# Altium PCB Motorsteuerung.PcbDoc
Units mm, origin at the board's own origin, x right, y up, seen from the top; angles counter-clockwise.
Board outline 63.63 x 66.55 mm, 4 copper layers (Top Layer, GND, 3V3, Bottom Layer), stack 0.603 mm thick; 42 components, 21 nets, 162 pads, 178 vias.
Unrouted connection lines stored in the file: 47.
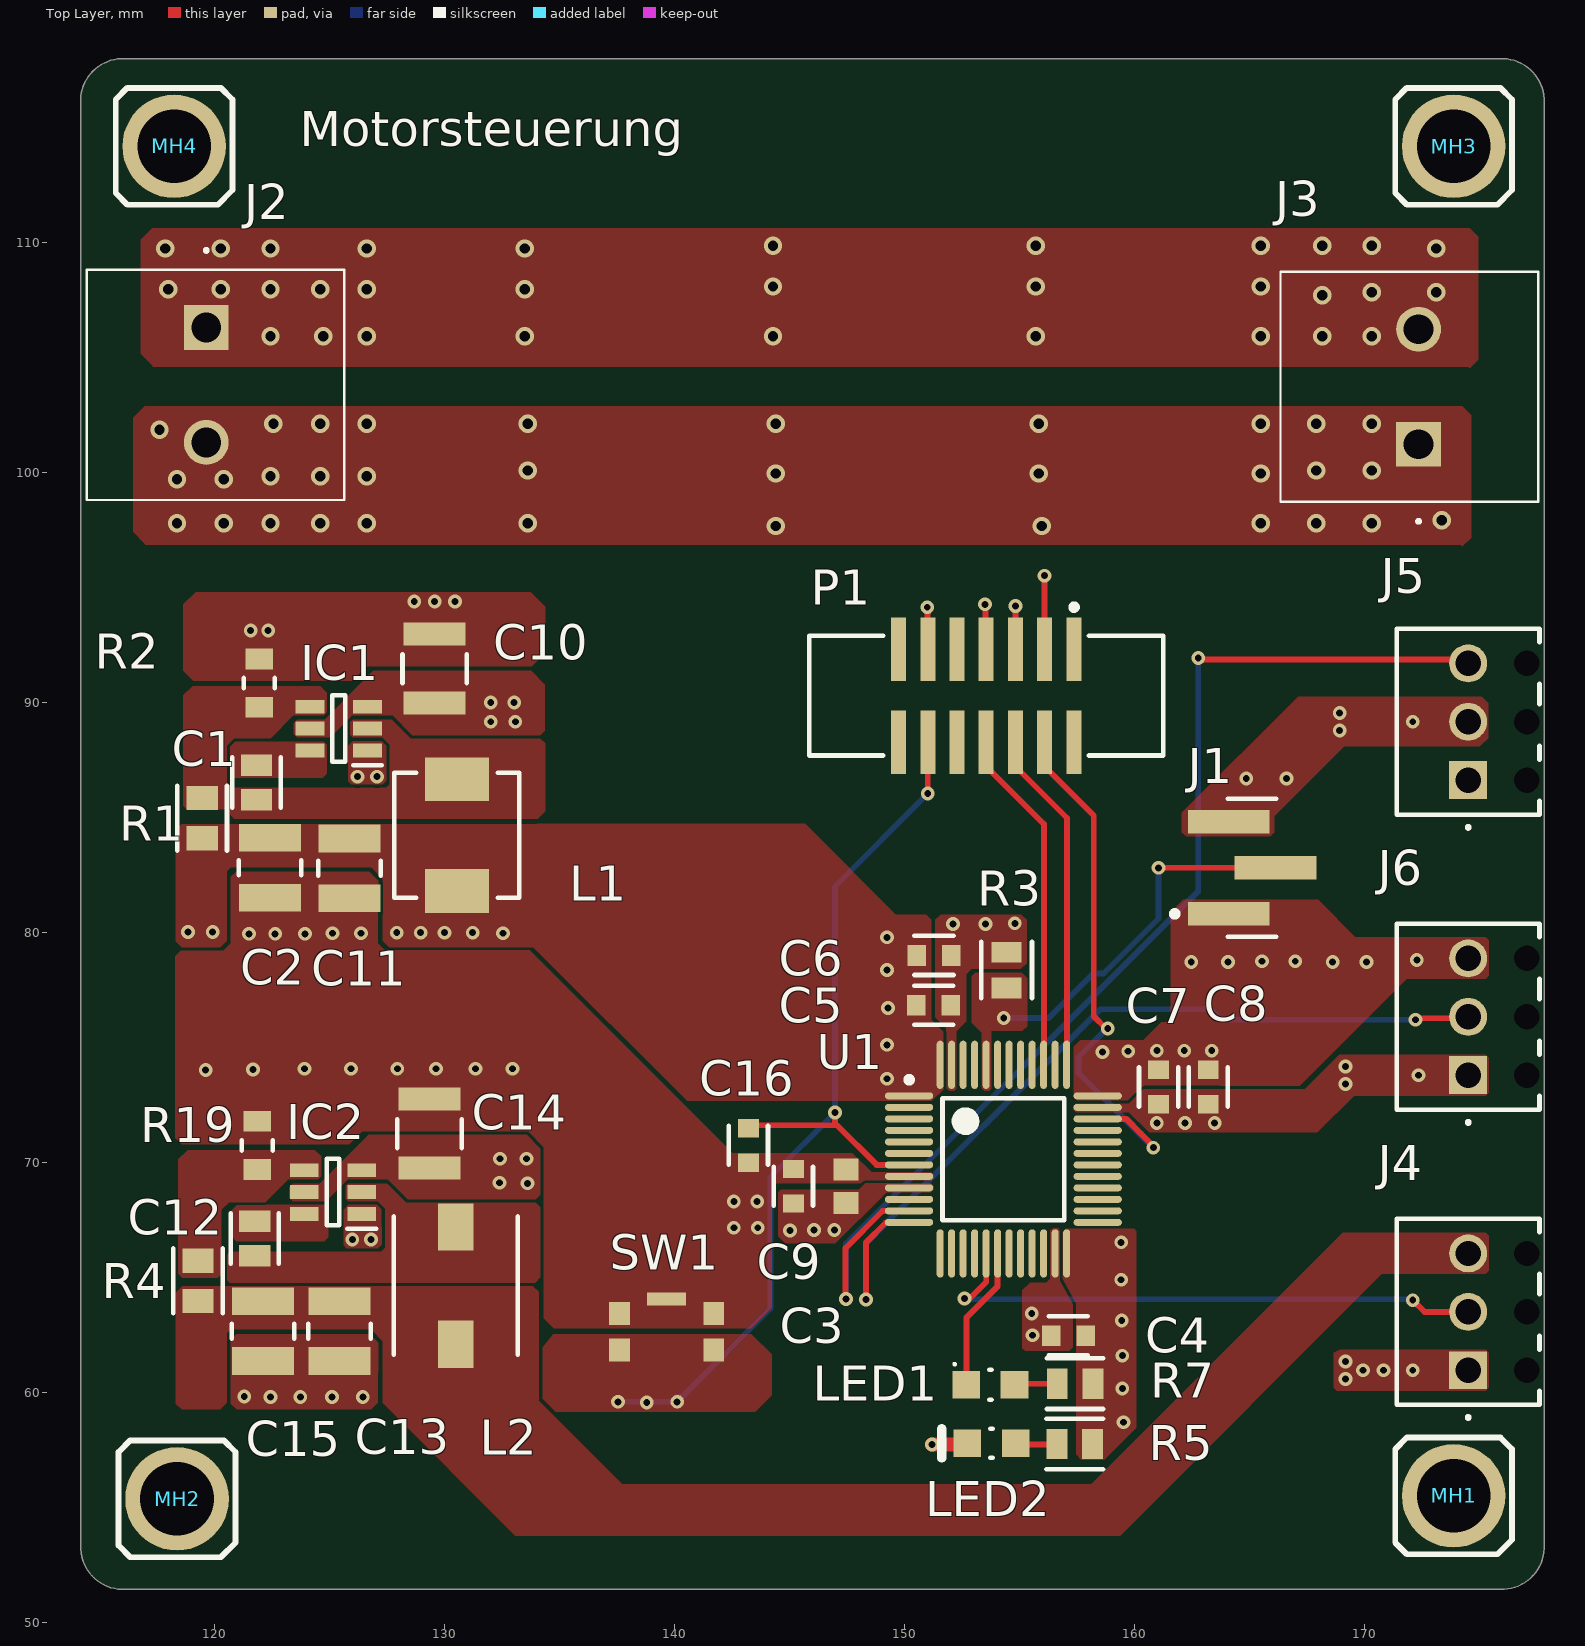
[diagram p0: Top Layer view]
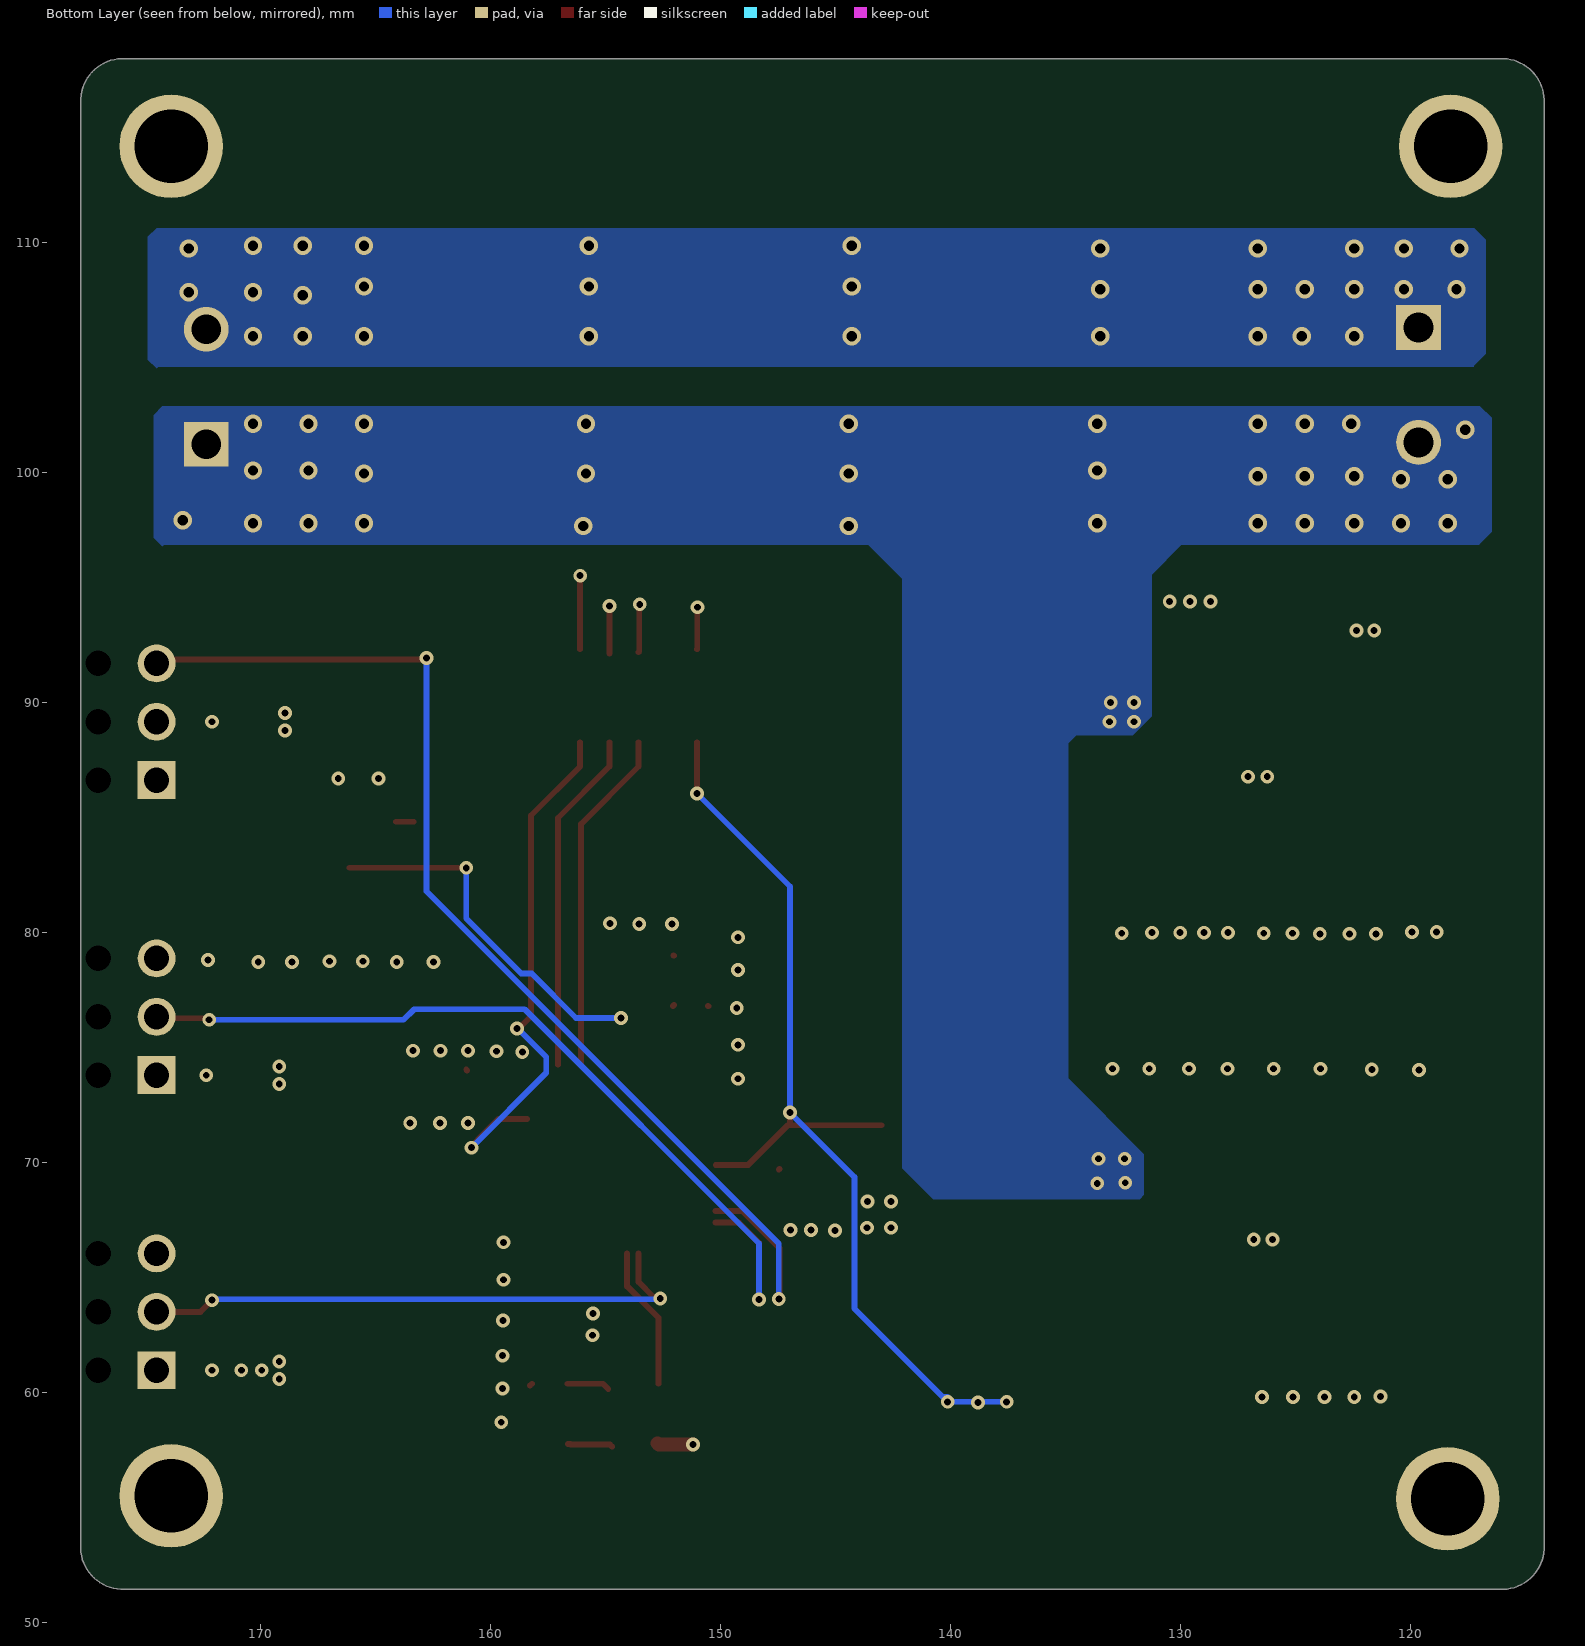
[diagram p1: Bottom Layer view, seen from below]
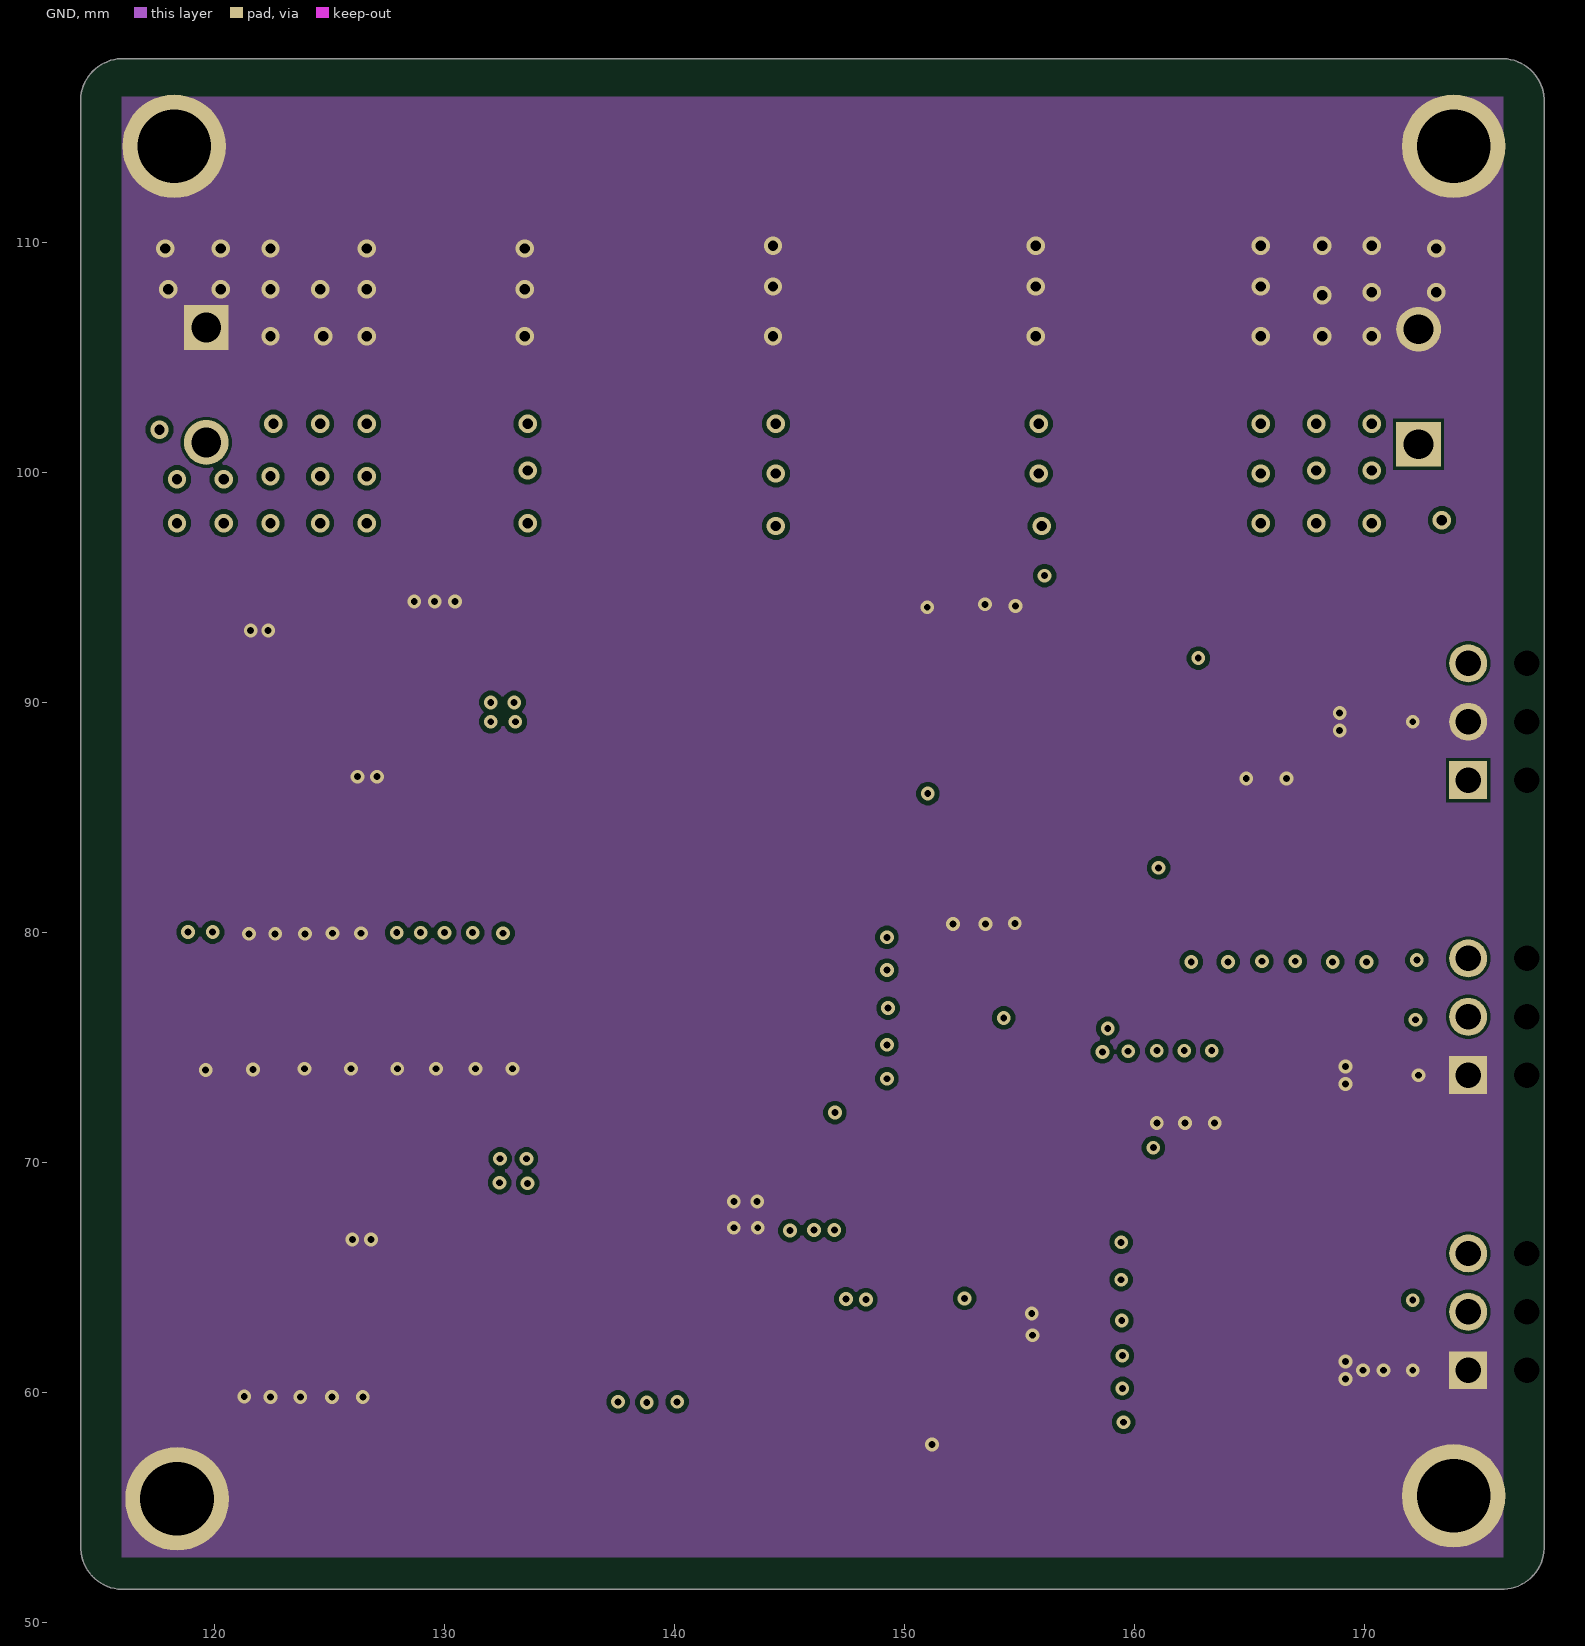
[diagram p2: GND]
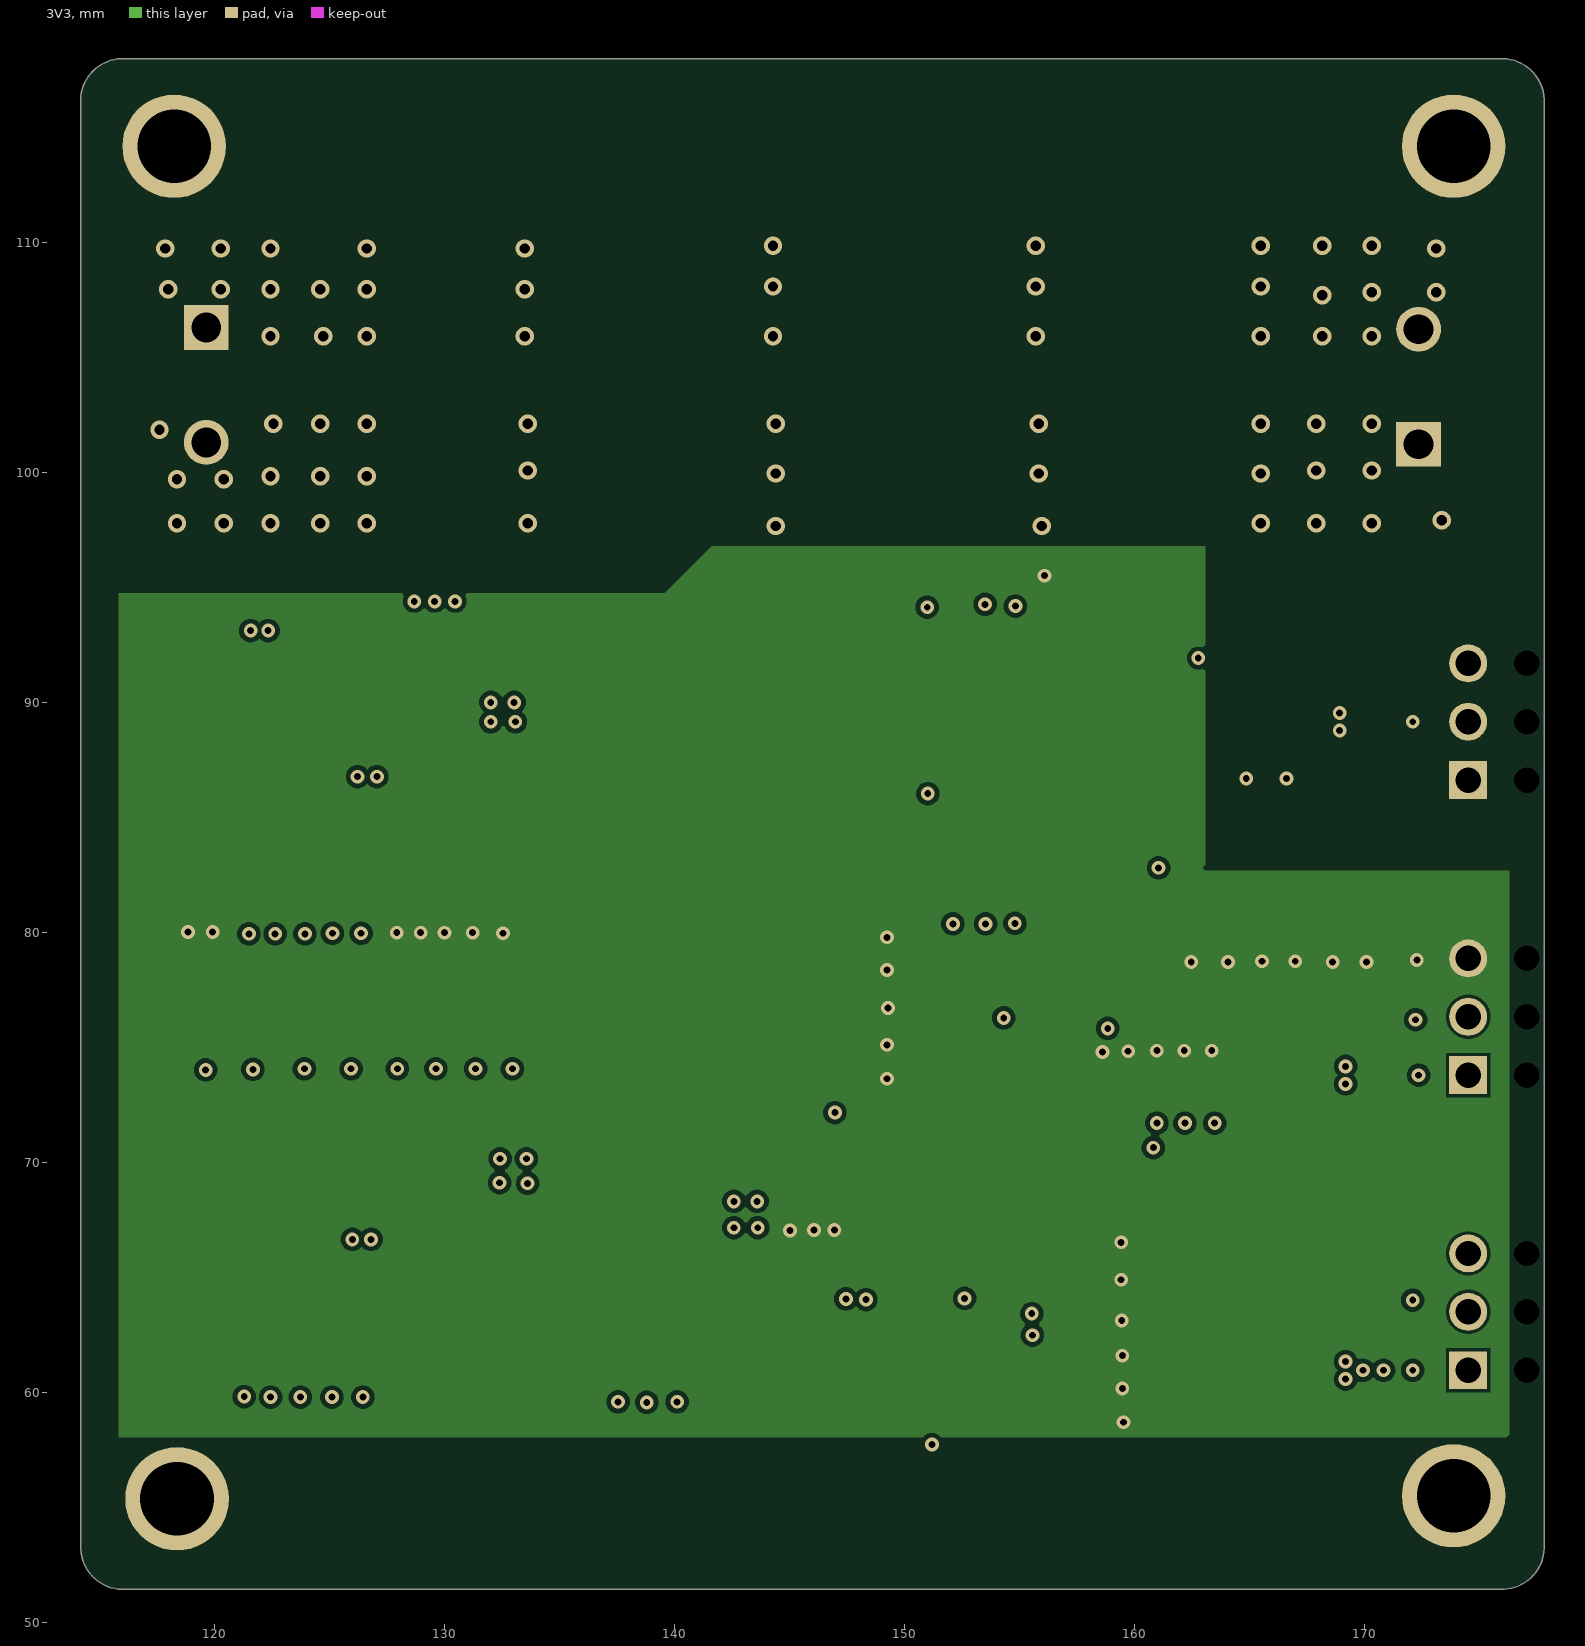
[diagram p3: 3V3]
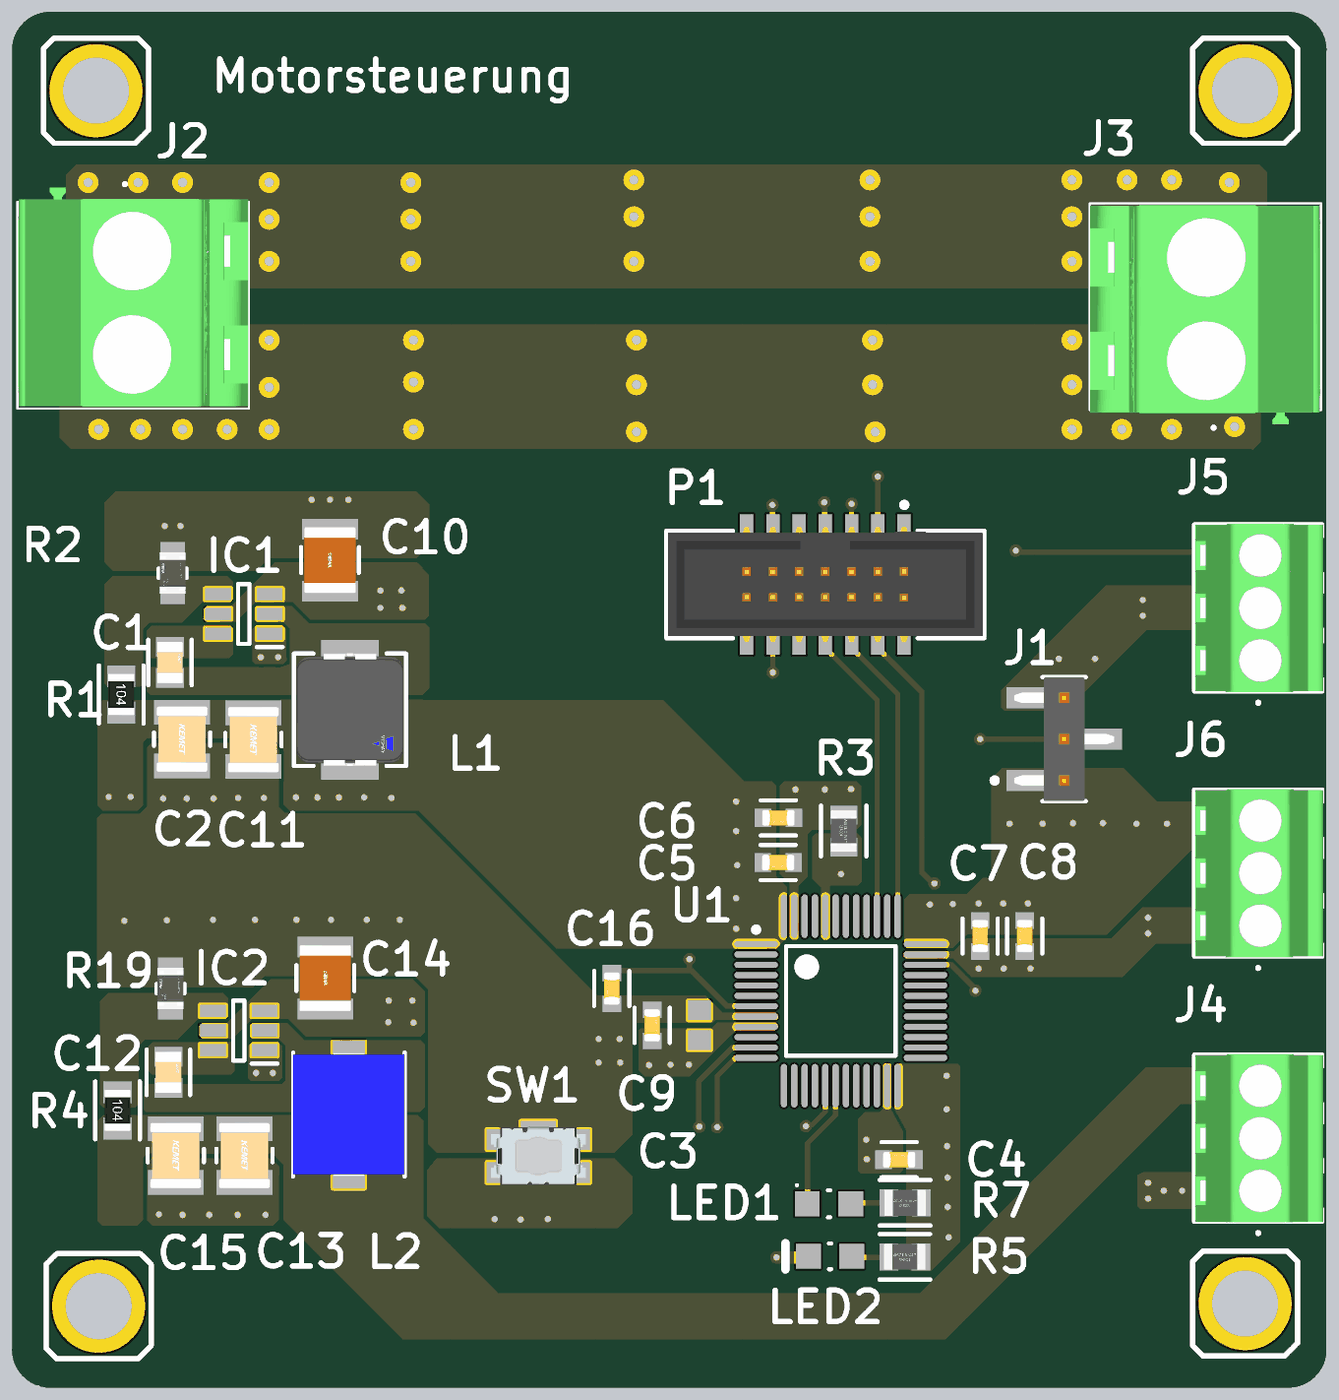
[diagram p4: 3D render of the assembled board from above, using the file's embedded part models]

## Layer stack, top to bottom
Top Solder: solder mask 0.0102, Solder Resist, Dk 3.5
Top Layer: signal copper 0.0356
Dielectric 2: prepreg 0.0711, PP-006, Dk 4.1
GND: signal copper 0.035
Dielectric 1: dielectric 0.32, FR-4, Dk 4.8
3V3: signal copper 0.035
Dielectric 3: prepreg 0.0711, PP-006, Dk 4.1
Bottom Layer: signal copper 0.0356
Bottom Solder: solder mask 0.0102, Solder Resist, Dk 3.5

## Board outline
114.173,53.34 ccw(c116.014,53.276) 115.951,51.435 175.895,51.435 ccw(c175.958,53.276) 177.8,53.213 177.8,116.078 ccw(c175.958,116.141) 176.022,117.983 116.078,117.983 ccw(c116.014,116.141) 114.173,116.205

## Design rules (kind name [scope] priority, off if disabled: settings)
Clearance [All] p1: gap=0.125 ignorepadtopadclearanceinfootprint=FALSE except(0.2: Via-Fill Via-Poly Via-Region)
HoleSize HoleSizeVia [IsVia] p1: absolutevalues=TRUE maxlimit=0.45 minlimit=0.25 maxpercent=80.000 minpercent=20.000
HoleSize HoleSizePTH [IsPad] p2: absolutevalues=TRUE maxlimit=5.6 minlimit=0.5 maxpercent=80.000 minpercent=20.000
HoleToHoleClearance [All] p1: gap=0.3 allowstackedmicrovias=TRUE
MinimumAnnularRing MinimumAnnularRingVias [All] p1: minimumring=0.1
MinimumAnnularRing MinimumAnnularRingGeneral [All] p2: minimumring=0.3
MinimumSolderMaskSliver [All] p1: minsoldermaskwidth=0.08
PasteMaskExpansion PasteMaskExpansion_2 [All] p1: expansion=0
PasteMaskExpansion PasteMaskExpansion_1 [All] p2: expansion=0
PasteMaskExpansion [InComponent('U1')] p3: expansion=0
PolygonConnect [All] p1: connectstyle=Direct reliefconductorwidth=0.254 reliefentries=4 polygonreliefangle="90 Angle" airgapwidth=0.254
RoutingVias [All] p1: holewidth=0.35 width=0.55 viastyle="Through Hole" minholewidth=0.3 minwidth=0.5 maxholewidth=0.45 maxwidth=0.65
SilkToSilkClearance SilkToSilkClerance [All] p1: silktosilkclearance=0.125
SilkToSolderMaskClearance [IsPad] p1: minsilkscreentomaskgap=0.125 clearancetoexposedcopper=TRUE
SolderMaskExpansion SolderMaskExpansion_1 [All] p1: expansion=0.102 istentingtop=FALSE
SolderMaskExpansion SolderMaskExpansionVia [IsVia] p2: expansion=0.1 istentingtop=TRUE useseparateexpansions=TRUE expansionbottom=0.1 istentingbottom=TRUE
SolderMaskExpansion [InComponent('U1')] p3: expansion=0 istentingtop=FALSE
SupplyNets "Schematic Supply Nets_5" [InNet('3V3')] p1: voltage=0.000
SupplyNets "Schematic Supply Nets_4" [InNet('12V')] p2: voltage=0.000
SupplyNets "Schematic Supply Nets_3" [InNet('5V')] p3: voltage=0.000
SupplyNets "Schematic Supply Nets_1" [InNet('GND')] p4: voltage=0.000
UnRoutedNet [All] p1: checkbadconnections=TRUE
Width [All] p1: maxlimit=2.54 minlimit=0.125 preferedwidth=0.254
23 further rules are at their usual default settings.

## Components (designator, comment, footprint, x,y, rotation, side; value= is the part's Value field where it differs from the comment)
C1 "100nf" FP-C0805C104M5UACTU-MFG 121.818,86.512 r270 top
C2 "22uF" FP-C1210C226K4RACTU-MFG 122.403,82.804 r270 top
C3 "10nF" CAPC1608X92X38ML15T08 147.447,68.961 r270 top
C4 "100nF" FP-CC0603-DA-MFG 157.112,62.459 r180 top value="100 nF"
C5 "100nF" FP-CC0603-DA-MFG 151.257,76.835 r0 top value="100 nF"
C6 "4,7uF" FP-CC0603-DA-MFG 151.269,78.994 r0 top value="4.7 uF"
C7 "100nF" FP-CC0603-DA-MFG 161.036,73.279 r270 top value="100 nF"
C8 "4,7uF" FP-CC0603-DA-MFG 163.195,73.279 r270 top value="4.7 uF"
C9 "1uF" FP-CC0603-DA-MFG 145.161,68.961 r90 top value="1 uF"
C10 "2.2uF" FP-CC1210-G3-MFG 129.565,91.465 r90 top
C11 "22uF" FP-C1210C226K4RACTU-MFG 125.857,82.779 r270 top
C12 "100nf" FP-C0805C104M5UACTU-MFG 121.742,66.688 r270 top
C13 "22uF" FP-C1210C226K4RACTU-MFG 125.425,62.662 r270 top
C14 "2.2uF" FP-CC1210-G3-MFG 129.337,71.247 r90 top
C15 "22uF" FP-C1210C226K4RACTU-MFG 122.098,62.662 r270 top
C16 "100nF" FP-CC0603-DA-MFG 143.205,70.739 r270 top value="100 nF"
IC1 "LMR51430XFDDCR" SOT95P280X110-6N 125.394,88.859 r180 top
IC2 "LMR51430XFDDCR" SOT95P280X110-6N 125.146,68.707 r180 top
J1 "TMM-103-01-L-S-SM" FP-TMM-103-01-L-S-SM-MFG 165.101,82.804 r90 top
J2 "1711026" 1711026 119.634,106.299 r270 top
J3 "1711026" 1711026 172.339,101.219 r90 top
J4 "1725669" 1725669 174.498,60.96 r90 top
J5 "1725669" 1725669 174.498,86.614 r90 top
J6 "1725669" 1725669 174.498,73.787 r90 top
L1 "2.2uH" FP-IHLP-2020BZ-FP_1_905X2-MFG 130.531,84.226 r270 top
L2 "3.3uH" INDPM6054X300N 130.48,64.643 r270 top
LED1 "LTST-C170KRKT" LTST-C170KRKT_V 153.772,57.785 r180 top
LED2 "LTST-C170KGKT" LTST-LTST-C170KGKT-2_V 153.721,60.325 r0 top
MH1 "MountingHole" MTH 173.863,55.499 r0 top
MH2 "MountingHole" MTH 118.364,55.372 r0 top
MH3 "MountingHole" MTH 173.863,114.173 r0 top
MH4 "MountingHole" MTH 118.237,114.173 r0 top
P1 "62701420621" 62701420621 153.543,90.285 r180 top
R1 "100k" FP-RQ73C2A-IPC_B 119.456,84.963 r270 top
R2 "22k1" FP-RT0805-MFG 121.945,90.83 r90 top value=22.1KΩ
R3 "10k" FP-CRGCQ0805-IPC_C 154.432,78.359 r90 top value=10KΩ
R4 "100k" FP-RQ73C2A-IPC_B 119.278,64.846 r270 top
R5 "1k" FP-CRGCQ0805-IPC_C 157.392,57.76 r180 top value=1KΩ
R7 "1k" FP-CRGCQ0805-IPC_C 157.404,60.376 r180 top value=1KΩ
R19 "13k7" FP-RT0805-MFG 121.844,70.739 r90 top value=13.7KΩ
SW1 "435441019830" 435441019830 139.649,62.636 r0 top
U1 "STM32F091CCT6" LQFP48_M 154.29,70.14 r0 top

## Footprints (in the part's own frame and the unit in brackets; to place one, negate y for a bottom-side part, rotate by r counter-clockwise, add the part's x,y. Pads: shape width x height; smd on the part's side, far side on the other; paste and mask are expansions set on the pad)
1711026 [mm]
  rect 1.95x1.95 hole 1.3: 1(0,0)
  round 1.95 hole 1.3: 2(5,0)
  silkscreen extent -3.4,-5.2 7.5,6, body extent -3.18,-5.17 7.42,5.98, height 18
1725669 [mm]
  rect 1.65x1.65 hole 1.1: 1(0,0)
  round 1.65 hole 1.1: 2(2.54,0) 3(5.08,0)
  round 0.55 hole 1.1 unplated: MH1(0,-2.54) MH2(2.54,-2.54) MH3(5.08,-2.54)
  silkscreen extent -2.1,-3.1 6.58,3.1, body extent -1.54,-3.15 6.6,3.05, height 8.5
62701420621 [mm] "Boc Header SMT type, 14p"
  rect 0.65x2.76 smd: 1(-3.81,-2.02) 2(-3.81,2.02) 3(-2.54,-2.02) 4(-2.54,2.02) 5(-1.27,-2.02) 6(-1.27,2.02) 7(0,-2.02) 8(0,2.02) 9(1.27,-2.02) 10(1.27,2.02) 11(2.54,-2.02) 12(2.54,2.02) 13(3.81,-2.02) 14(3.81,2.02)
  silkscreen extent -7.7,-3.97 7.7,2.6, body extent -7.62,-2.8 7.62,2.8, height 5.2
435441019830 [mm] "Tact Switch, SMT, body 4.1x2.8mm"
  rect 0.9x1 smd: A1(-2.05,0.8) A2(2.05,0.8) B1(-2.05,-0.8) B2(2.05,-0.8)
  rect 1.7x0.55 smd: G1(0,1.425)
  body extent -2.3,-1.4 2.3,1.45, height 1.9
CAPC1608X92X38ML15T08 [mm] "Chip Capacitor, 2-Leads, Body 1.60x0.80mm, IPC Low Density"
  rect 0.95x1.1 smd: 1(-0.725,0) 2(0.725,0)
  body extent -0.87,-0.48 0.87,0.47, height 0.92
FP-C0805C104M5UACTU-MFG [mm]
  rect 0.95x1.35 smd paste+0 mask+0: 1(-0.75,0) 2(0.75,0)
  silkscreen extent -1.1,-1.05 1.1,1.05, body extent -1.4,-0.85 1.4,0.85, height 0.25
FP-C1210C226K4RACTU-MFG [mm]
  rect 1.2x2.7 smd paste+0 mask+0: 1(-1.3,0) 2(1.3,0)
  silkscreen extent -0.33,-1.36 0.33,1.36, body extent -2,-1.5 2,1.5, height 0.25
FP-CC0603-DA-MFG [mm]
  rect 0.8x0.9 smd paste+0 mask+0: 1(-0.75,0) 2(0.75,0)
  silkscreen extent -0.85,-0.85 0.85,0.85, body extent -1.35,-0.75 1.35,0.75, height 0.25
FP-CC1210-G3-MFG [mm]
  rect 1x2.7 smd paste+0 mask+0: 1(-1.5,0) 2(1.5,0)
  silkscreen extent -0.63,-1.4 0.63,1.4, body extent -2.32,-1.83 2.32,1.83, height 0.25
FP-CRGCQ0805-IPC_C [mm]
  rect 0.906x1.31 smd paste+0 mask+0: 1(-0.776,0) 2(0.776,0)
  silkscreen extent -1.23,-1.1 1.23,1.1, body extent -1.33,-0.8 1.33,0.8, height 0.25
FP-IHLP-2020BZ-FP_1_905X2-MFG [mm]
  rect 1.905x2.79 smd paste+0 mask+0: 1(-2.425,0) 2(2.425,0)
  silkscreen extent -2.72,-2.72 2.72,2.72, body extent -3.48,-2.82 3.48,2.82, height 0.25
FP-RQ73C2A-IPC_B [mm]
  rect 1.058x1.362 smd paste+0 mask+0: 1(-0.877,0) 2(0.877,0)
  silkscreen extent -1.41,-1.08 1.41,1.08, body extent -1.66,-0.93 1.66,0.93, height 0.25
FP-RT0805-MFG [mm]
  rect 0.9x1.2 smd paste+0 mask+0: 1(-1.05,0) 2(1.05,0)
  silkscreen extent -0.23,-0.67 0.23,0.67, body extent -1.6,-0.77 1.6,0.77, height 0.25
FP-TMM-103-01-L-S-SM-MFG [mm]
  rect 1.02x3.56 smd paste+0 mask+0: 1(-2,1.015) 2(0,-1.015) 3(2,1.015)
  silkscreen extent -3,-1.05 3,3.49, body extent -3.1,-2.89 3.1,2.89, height 0.25
INDPM6054X300N [mm]
  rect 2.05x1.55 smd: 1(-2.55,0) 2(2.55,0)
  silkscreen extent -3,-2.7 3,2.7, body extent -3,-2.7 3,2.7, height 3
LQFP48_M [mm] "Thin QFP, 48-Leads, Body 7x7mm, Pitch 0.5mm, IPC Low Density"
  oval 2.1x0.3 smd: 1(-4.1,2.75) 2(-4.1,2.25) 3(-4.1,1.75) 4(-4.1,1.25) 5(-4.1,0.75) 6(-4.1,0.25) 7(-4.1,-0.25) 8(-4.1,-0.75) 9(-4.1,-1.25) 10(-4.1,-1.75) 11(-4.1,-2.25) 12(-4.1,-2.75) 25(4.1,-2.75) 26(4.1,-2.25) 27(4.1,-1.75) 28(4.1,-1.25) 29(4.1,-0.75) 30(4.1,-0.25) 31(4.1,0.25) 32(4.1,0.75) 33(4.1,1.25) 34(4.1,1.75) 35(4.1,2.25) 36(4.1,2.75)
  oval 0.3x2.1 smd: 13(-2.75,-4.1) 14(-2.25,-4.1) 15(-1.75,-4.1) 16(-1.25,-4.1) 17(-0.75,-4.1) 18(-0.25,-4.1) 19(0.25,-4.1) 20(0.75,-4.1) 21(1.25,-4.1) 22(1.75,-4.1) 23(2.25,-4.1) 24(2.75,-4.1) 37(2.75,4.1) 38(2.25,4.1) 39(1.75,4.1) 40(1.25,4.1) 41(0.75,4.1) 42(0.25,4.1) 43(-0.25,4.1) 44(-0.75,4.1) 45(-1.25,4.1) 46(-1.75,4.1) 47(-2.25,4.1) 48(-2.75,4.1)
  silkscreen extent -4.22,-2.65 2.65,3.57, body extent -3.5,-3.5 3.5,3.5, height 1.6
LTST-C170KRKT_V [mm] "SMD, 2-Leads, Body 2x1.25mm"
  rect 1.2x1.2 smd: 1(-1.05,0) 2(1.05,0)
  silkscreen extent -0.05,-0.63 2.16,0.64, body extent -1,-0.63 1,0.63, height 1.2
LTST-LTST-C170KGKT-2_V [mm] "SMD, 2-Leads, Body 2.00x1.25mm"
  rect 1.2x1.2 smd: 1(-1.05,0) 2(1.05,0)
  silkscreen extent -1.6,-0.65 0.05,0.95, body extent -1,-0.63 1,0.63, height 1.1
MTH [mm]
  round 4.5 hole 3.2: 1(0,0)
  silkscreen extent -2.54,-2.54 2.54,2.54
SOT95P280X110-6N [mm]
  rect 1.25x0.6 smd: 1(-1.25,0.95) 2(-1.25,0) 3(-1.25,-0.95) 4(1.25,-0.95) 5(1.25,0) 6(1.25,0.95)
  silkscreen extent -1.88,-1.45 0.28,1.6, body extent 0,0 0,0

## Part data
C1 C12: library part CMP-2007-03742-2, "CAP CER 0.1UF 50V Z5U 0805", Capacitance=100nF, Case Code (Imperial)=0805, Case Code (Metric)=2012, Dielectric=Z5U, Dielectric Material=Ceramic, Max Operating Temperature=85°C, Min Operating Temperature=10°C, Package Quantity=1, Tolerance=20%, Voltage=50V, Case/Package=0805, Construction=Flat, Contact Plating=Tin, Depth=1.25mm, Dissipation Factor=4%, Height=0.78mm, Lead Free="Lead Free", Lead Pitch=0.75mm, Length=2mm, Mount="Surface Mount", Number of Pins=2, Packaging="Tape and Reel", Radiation Hardening=No, REACH SVHC="No SVHC", RoHS Compliant=Yes, Series=C, Termination=SMD/SMT, Thickness=0.035inch, Voltage Rating=50V, Voltage Rating (DC)=50V, Width=1.2mm
C2 C11 C13 C15: library part CMP-03020-034651-1, "CAP CER 22UF 16V X7R 1210", Case Code (Imperial)=1210, Case Code (Metric)=3225, Dielectric=X7R, Dielectric Material=Ceramic, Max Operating Temperature=125°C, Min Operating Temperature=-55°C, Package Quantity=1000, Tolerance=10%, Voltage=16V, Capacitance=22uF, Case/Package=1210, Depth=2.5mm, Dissipation Factor=5%, Height=2.5mm, Length=3.2mm, Mount="Surface Mount", Packaging="Cut Tape", REACH SVHC="No SVHC", Termination=SMD/SMT, Thickness=0.11inch, Voltage Rating=16V, Voltage Rating (DC)=16V, Weight=0.000564oz, Width=0.098inch
C3: library part CMP-2006-01137-1, Manufacturer=Vitramon, Part Number=VJ0603Y103KXJAC
C4 C5 C7 C16: library part CMP-03422-000234-1, "CAP CER 0.1UF 25V X7R 0603", Capacitance="100 nF", Manufacturer=YAGEO, Manufacturer Part Number=CC0603KRX7R8BB104, Package=CC0603-DA, Temperature="-55°C to +125°C", Temperature Characteristic=X7R, Temperature Coefficient=15%, Temperature Range High=+125°C, Temperature Range Low=-55°C, Tolerance=0.1, Voltage="25 V", Automotive=No, Category=Cap, ComponentLink2Description=Datasheet, ComponentLink2URL=http://www.yageo.com/documents/recent/UPY-GPHC_X7R_6.3V-to-50V_18.pdf, Device Class L1="Passive Components", Device Class L2=Capacitors, Device Class L3="Ceramic Capacitors", Digikey Description="CAP CER 0.1UF 25V X7R 0603", Footprint Url=http://www.yageo.com/exep/pages/download/literatures/UPY-C_GEN_24.pdf, Height=0.9mm, Lead Free=Yes, Material=Ceramic, Mouser Description="CC Series 0603 0.1 uF 25 V ±10% Tolerance X7R SMT Multilayer Ceramic Capacitor", Octopart=https://octopart.com/cc0603krx7r8bb104-yageo-8376534, RoHS=TRUE, Voltage Rating="25 V"
C6 C8: library part CMP-03422-001236-1, "CAP CER 4.7UF 16V X5R 0603", Capacitance="4.7 uF", Manufacturer=YAGEO, Manufacturer Part Number=CC0603KRX5R7BB475, Package=CC0603-DA, Temperature="-55°C to +125°C", Temperature Characteristic=X5R, Temperature Coefficient=15%, Temperature Range High=+125°C, Temperature Range Low=-55°C, Tolerance=0.1, Voltage="16 V", Automotive=No, Category=Cap, ComponentLink2Description=Datasheet, ComponentLink2URL=http://www.yageo.com/documents/recent/UPY-GPHC_X7R_6.3V-to-50V_18.pdf, Device Class L1="Passive Components", Device Class L2=Capacitors, Device Class L3="Ceramic Capacitors", Digikey Description="CAP CER 4.7UF 16V X5R 0603", Footprint Url=http://www.yageo.com/exep/pages/download/literatures/UPY-C_GEN_24.pdf, Height=0.9mm, Lead Free=Yes, Material=Ceramic, Mouser Description="Multilayer Ceramic Capacitors MLCC - SMD/SMT 4.7uF 16V X5R 10%", Octopart=https://octopart.com/cc0603krx5r7bb475-yageo-34978295, RoHS=TRUE, Voltage Rating="16 V"
C9: library part CMP-1035-02737-2, "CAP CER 1UF 16V X5R 0603", Capacitance="1 uF", Manufacturer=YAGEO, Manufacturer Part Number=CC0603KRX5R7BB105, Package=CC0603-DA, Temperature="-55°C to +125°C", Temperature Characteristic=X5R, Temperature Coefficient=15%, Temperature Range High=+125°C, Temperature Range Low=-55°C, Tolerance=0.1, Voltage="16 V", Automotive=No, Category=Cap, ComponentLink2Description=Datasheet, ComponentLink2URL=http://www.yageo.com/documents/recent/UPY-GPHC_X7R_6.3V-to-50V_18.pdf, Device Class L1="Passive Components", Device Class L2=Capacitors, Device Class L3="Ceramic Capacitors", Digikey Description="CAP CER 1UF 16V X5R 0603", Footprint Url=http://www.yageo.com/exep/pages/download/literatures/UPY-C_GEN_24.pdf, Height=0.9mm, Lead Free=Yes, Material=Ceramic, Mouser Description="Multilayer Ceramic Capacitors MLCC - SMD/SMT 1.0uF 16V X5R 10%", Octopart=https://octopart.com/cc0603krx5r7bb105-yageo-8376530, RoHS=TRUE, Voltage Rating="16 V"
C10 C14: library part CMP-03422-001503-1, "CAP CER 1210", Case/Package=1210, Dielectric=X7R, Max Operating Temperature=125°C, Min Operating Temperature=-55°C, Tolerance=10%, Capacitance=2.2uF, Depth=2.5mm, Length=3.2mm, Packaging="Tape and Reel", RoHS Compliant=Yes
IC1 IC2: "Integrated Circuit", Manufacturer_Name="Texas Instruments", Mouser Part Number=595-LMR51430XFDDCR, Arrow Part Number=LMR51430XFDDCR, Arrow Price/Stock=https://www.arrow.com/en/products/lmr51430xfddcr/texas-instruments.html?utm_currency=USD&region=nac, Datasheet Link=https://www.ti.com/lit/ds/symlink/lmr51420.pdf?ts=1651317966125, Height=1.1mm, Manufacturer_Part_Number=LMR51430XFDDCR, Mouser Price/Stock=https://www.mouser.co.uk/ProductDetail/Texas-Instruments/LMR51430XFDDCR?qs=vvQtp7zwQdOoH7ISqkGKmw%3D%3D
J1: library part CMP-02766-001735-1, "CONN HEADER SMD 3POS 2MM", Flammability Rating="UL94 V-0", Housing Color=Black, Max Current Rating=3.9A, Max Operating Temperature=125°C, Max Voltage Rating (AC)=500V, Min Operating Temperature=-55°C, Connector Type=Header, Contact Finish - Mating=GOLD, Contact Material=Bronze, Contact Plating=Gold, Contact Shape=Square, Contact Type="Male Pin", Depth=1.97mm, Fastening Type=Pull, Gender=Male, Housing Material=Polymer, Insulation Color=Black, Insulation Material=Polymer, Lead Free="Lead Free", Length=6mm, Number of Contacts=3, Number of Positions=3, Number of Rows=1, Orientation=Straight, Packaging=Bulk, Pitch=2mm, Radiation Hardening=No, REACH SVHC="No SVHC", RoHS Compliant=Yes, Series=TMM, Termination=Solder
J2 J3: "Connector", Manufacturer_Name="Phoenix Contact", Mouser Part Number=651-1711026, Arrow Part Number=1711026, Arrow Price/Stock=https://www.arrow.com/en/products/1711026/phoenix-contact?utm_currency=USD&region=nac, Datasheet Link=https://www.phoenixcontact.com/en-us/products/printed-circuit-board-terminal-mkds-3-2-1711026?type=pdf, Height=18.2mm, Manufacturer_Part_Number=1711026, Mouser Price/Stock=https://www.mouser.co.uk/ProductDetail/Phoenix-Contact/1711026?qs=JcjeNNoqGSMahJ%2FDM5awSg%3D%3D
J4 J5 J6: "Connector", Manufacturer_Name="Phoenix Contact", Mouser Part Number=651-1725669, Arrow Part Number=1725669, Arrow Price/Stock=https://www.arrow.com/en/products/1725669/phoenix-contact?utm_currency=USD&region=nac, Datasheet Link=https://www.phoenixcontact.com/en-us/products/printed-circuit-board-terminal-mpt-05-3-254-1725669?type=pdf, Height=8.65mm, Manufacturer_Part_Number=1725669, Mouser Price/Stock=https://www.mouser.co.uk/ProductDetail/Phoenix-Contact/1725669?qs=A%2FKWGUWTCZjmkTL0Oe91ew%3D%3D
L1: library part CMP-02424-000260-1, "Fixed Inductors Commercial Low DCR Series 2.2uH 5A 37.7mΩ 20%", Case/Package=2020, Current Rating=5A, DC Resistance (DCR)=37.7mR, Inductance Tolerance=20%, Max DC Current=5.5A, Max Operating Temperature=125°C, Min Operating Temperature=-55°C, Package Quantity=2000, Self Resonant Frequency=41MHz, Test Frequency=100kHz, Contact Plating=Tin, Core Material=Metal, Depth=5.43mm, Height=2mm, Height - Seated (Max)=0.079inch, Inductance=2.2uH, Lead Free="Lead Free", Length=5.74mm, Military Standard=Not, Mount="Surface Mount", Number of Pins=2, Packaging="Tape and Reel", Radiation Hardening=No, RMS Current (Irms)=5A, Saturation Current=5.5A, Shielding=Shielded, Termination=SMD/SMT, Tolerance=20%, Width=0.204inch
L2: library part PA4340.332NLT, "Inductor", Manufacturer_Name="Yageo Group", Mouser Part Number=673-PA4340.332NLT, Arrow Part Number=PA4340.332NLT, Arrow Price/Stock=https://www.arrow.com/en/products/pa4340.332nlt/pulse-electronics-corporation?utm_currency=USD&region=europe, Datasheet Link=https://www.arrow.com/en/products/pa4340.332nlt/pulse-electronics-corporation, Height=3mm, Manufacturer_Part_Number=PA4340.332NLT, Mouser Price/Stock=https://www.mouser.co.uk/ProductDetail/Pulse-Electronics/PA4340332NLT?qs=%2FzQKu7YvIMZ40DmrCvsoMQ%3D%3D
LED1: library part CMP-2000-07593-1, "LED Red, 75 mW, 54 mcd, -55 to 85 degC, 2-Pin SMD, RoHS, Tape and Reel", Case Code (Imperial)=0805, Case Code (Metric)=2012, Colour=Red, Forward Current=30mA, Forward Voltage=2V, Lens Colour=Colorless, Manufacturer=Lite-On, Max Operating Temperature=85degC, Min Operating Temperature=-55degC, Package Description="2-Pin Surface Mount Device, Body 2 x 1.25 mm", Package Quantity=1, Package Reference=C170KRKT, Power Dissipation=75mW, Test Current=20mA, Case\/Package=0805, Datasheet URL=http://optoelectronics.liteon.com/upload/download/DS-22-99-0150/LTST-C170KRKT.pdf, Datasheet Version="Rev. D, 11/2014", Depth=1.6mm, Dominant Wavelength=631nm, Height=1.1mm, Illumination Colour=Red, Lead Free=LeadFree, Length=3.2mm, Lens Style=Rectangular, Lens Transparency=Clear, Luminous Intensity=54mcd, Manufacturer URL=http://www.us.liteon.com/, Mount=SurfaceMount, Mounting Technology=SurfaceMount, Number of Elements=1, Number of LEDs=1, Number of Pins=2, Packaging=TapeandReel, Power Rating=75mW, Radiation Hardening=No, RoHSCompliant=True, Viewing Angle=130degrees, Wavelength=639nm, Width=1.25mm
LED2: library part CMP-2000-06620-1, "Ultra Bright AlInGaP Chip LED, 75 mW, -55 to 85 degC, 2-Pin SMD (0805), RoHS, Tape and Reel", Emitting Color=YellowGreen, Forward Current=30mA, Forward Voltage=2.4V, Manufacturer=Lite-On, Operating Temp Range=-55Cto85C, Operating Temperature Classification=Industrial, Package Description="2-Pin Surface Mounted Device, Body 2 x 1.25 mm", Package Reference=LTST-C170KGKT-2, Package Type=ChipLed, Power Dissipation=75W, Power Dissipation Max=75mW, Reverse Voltage=5V, Test Current (It)=20mA, Chip Material=AlGaInP, Datasheet URL=http://optoelectronics.liteon.com/upload/download/DS22-2000-073/S_110_LTST-C170KGKT.pdf, Datasheet Version="Rev. G, 06/2005", DELETED=Compliant, Dominant Wave Length=571nm, Forward Current Max=30mA, High Brightness=Yes, Lens Dimensions=1.4x1.25x0.6mm, Lum Intensity=35mcd, Luminous Intensity=35mcd, Main Category=ChipLED, Manufacturer URL=http://www.us.liteon.com/, Mounting=SurfaceMount, Mounting Technology=SurfaceMount, Number of  Elements=1, Packaging=TapeandReel, Peak Wavelength=574nm, Pin Count=2, Product Depth (mm)=1.25mm, Product Height (mm)=1.1mm, Product Length (mm)=2mm, Rad Hardened=No, Shape Type=Rectangular, Type=Uni-Color, Viewing Angle=130deg
P1: library part CMP-03913-133967346-2, "Conn, Hdr, 14Pos, 2Row, 1.27Mm, Smt Rohs Compliant: Yes", Current Rating=1A, Insulation Resistance=1GΩ, Max Operating Temperature=105°C, Min Operating Temperature=-40°C, Length=13.64mm, Number of Pins=14, Pitch=1.27mm, RoHS=Compliant
R1 R4: library part CMP-03211-011351-1, "RQ73 0805 100KΩ 0.2W 10ppm/°C 0.1% 100V"
R2: library part CMP-2001-01692-2, "RES SMD 22.1K OHM 0.1% 1/8W 0805", Manufacturer=Yageo, Manufacturer Part Number=RT0805BRD0722K1L, Package=RT0805, Power Rating=0.125W, Resistance=22.1KΩ, Temperature="-55°C to +155°C", Temperature Coefficient="25 ppm/°C", Temperature Range High=+155°C, Temperature Range Low=-55°C, Tolerance=0.0025, Voltage Rating=150V, Automotive=No, Category=Res, ComponentLink2Description=Datasheet, ComponentLink2URL=http://www.yageo.com/documents/recent/PYu-RT_1-to-0.01_RoHS_L_9.pdf, Composition="Thin Film", Device Class L1="Passive Components", Device Class L2=Resistors, Device Class L3="Chip SMD Resistors", Digikey Description="RES SMD 22.1K OHM 0.1% 1/8W 0805", Footprint Url=http://www.yageo.com/exep/pages/download/literatures/PYu-R_Mount_10.pdf, Height=0.6mm, Ipc Land Pattern Name=RESC200125X50, Lead Free=Yes, Mouser Description="Thin Film Resistors - SMD 1/8W 22.1K ohm .1% 25ppm", Octopart=https://octopart.com/rt0805brd0722k1l-yageo-1447960, RoHS=TRUE, Series=RT
R3: library part CMP-03211-002989-1, "CRGCQ 0805 10K 5%", Ambient Temperature Range High=+70°C, Manufacturer="TE Connectivity", Manufacturer Part Number=CRGCQ0805J10K, Package=CRGCQ0805, Power Rating=0.125W, Resistance=10KΩ, Temperature="-55°C to +155°C", Temperature Coefficient=±100ppm/°C, Temperature Range High=+155°C, Temperature Range Low=-55°C, Tolerance=0.05, Voltage Rating=150V, Automotive=Yes, Automotive Grade="Grade 914", Category=Res, ComponentLink2Description=Datasheet, ComponentLink2URL=https://www.te.com/commerce/DocumentDelivery/DDEController?Action=showdoc&DocId=Data+Sheet%7F1773204-3%7F1%7Fpdf%7FEnglish%7FENG_DS_1773204-3_1.pdf%7F4-2176341-923, Composition="Thick Film", Device Class L1="Passive Components", Device Class L2=Resistors, Device Class L3="Chip SMD Resistors", Digikey Description="CRGCQ 0805 10K 5%", Height=0.65mm, Ipc Land Pattern Name=RESC200125X55, Lead Free=Yes, Mouser Description="Res Thick Film 0805 10K Ohm 5% 0.125W(1/8W) ±100ppm/C Pad SMD Automotive T/R", Octopart=https://octopart.com/crgcq0805j10k-te+connectivity-91018201, RoHS=TRUE, Series=CRGCQ
R5 R7: library part CMP-03211-004613-1, "CRGCQ 0805 1K0 1%", Ambient Temperature Range High=+70°C, Manufacturer="TE Connectivity", Manufacturer Part Number=CRGCQ0805F1K0, Package=CRGCQ0805, Power Rating=0.125W, Resistance=1KΩ, Temperature="-55°C to +155°C", Temperature Coefficient=±100ppm/°C, Temperature Range High=+155°C, Temperature Range Low=-55°C, Tolerance=0.01, Voltage Rating=150V, Automotive=Yes, Automotive Grade="Grade 685", Category=Res, ComponentLink2Description=Datasheet, ComponentLink2URL=https://www.te.com/commerce/DocumentDelivery/DDEController?Action=showdoc&DocId=Data+Sheet%7F1773204-3%7F1%7Fpdf%7FEnglish%7FENG_DS_1773204-3_1.pdf%7F4-2176341-694, Composition="Thick Film", Device Class L1="Passive Components", Device Class L2=Resistors, Device Class L3="Chip SMD Resistors", Digikey Description="CRGCQ 0805 1K0 1%", Height=0.65mm, Ipc Land Pattern Name=RESC200125X55, Lead Free=Yes, Octopart=https://octopart.com/crgcq0805f1k0-te+connectivity-91018154, RoHS=TRUE, Series=CRGCQ
R19: library part CMP-03412-025952-1, "RES 13.7K OHM 1/8W .1% SMD 0805", Manufacturer=Yageo, Manufacturer Part Number=RT0805BRD0713K7L, Package=RT0805, Power Rating=0.125W, Resistance=13.7KΩ, Temperature="-55°C to +155°C", Temperature Coefficient="25 ppm/°C", Temperature Range High=+155°C, Temperature Range Low=-55°C, Tolerance=0.0025, Voltage Rating=150V, Automotive=No, Category=Res, ComponentLink2Description=Datasheet, ComponentLink2URL=http://www.yageo.com/documents/recent/PYu-RT_1-to-0.01_RoHS_L_9.pdf, Composition="Thin Film", Device Class L1="Passive Components", Device Class L2=Resistors, Device Class L3="Chip SMD Resistors", Digikey Description="RES 13.7K OHM 1/8W .1% SMD 0805", Footprint Url=http://www.yageo.com/exep/pages/download/literatures/PYu-R_Mount_10.pdf, Height=0.6mm, Ipc Land Pattern Name=RESC200125X50, Lead Free=Yes, Mouser Description="Thin Film Resistors - SMD 1/8W 13.7K ohm .1% 25ppm", Octopart=https://octopart.com/rt0805brd0713k7l-yageo-1409410, RoHS=TRUE, Series=RT
SW1: library part CMP-03913-134708203-4, "Tactile Switch, 0.05A, 32Vdc, Smd, 300Gf Rohs Compliant: Yes", Current Rating=50mA, Insulation Resistance=1GΩ, Manufacturer Lifecycle Status=ACTIVE, Max Operating Temperature=125°C, Min Operating Temperature=-55°C, Voltage Rating=32V, Contact Plating=Silver, Height=1.9mm, Lifecycle Status=Production, Packaging="Tape and Reel", RoHS=Compliant, YEOL="1 = Estimated lifetime > 10 years"
U1: library part CMP-0304-00055-1, "ARM-based 32-bit MCU, CAN, 12 timers, ADC, DAC & Comm. Interface, 2 to 3.6 V, -40 to 85 degC, 48-Pin LQFP, RoHS, Tray", Capacitive Sensing Channels=16, CPU Frequency="48 MHz Max.", Manufacturer=STMicroelectronics, Operating Voltage="2 to 3.6 V", Temperature Range="-40 to 85 degC", ComponentLink1Description="Manufacturer URL", ComponentLink1URL=www.st.com, ComponentLink2Description=Datasheet, ComponentLink2URL=http://www.st.com/st-web-ui/static/active/en/resource/technical/document/datasheet/DM00115237.pdf, ComponentLink3Description="Package Specification", ComponentLink3URL=http://www.st.com/st-web-ui/static/active/en/resource/technical/document/datasheet/DM00115237.pdf, DatasheetVersion="Rev. 2", Flash="256 Kbytes", GPIOs=37, Mounting Technology="Surface Mount", PackageDescription="48-Pin Low-Profile Quad Flat Package, Body 7 x 7 mm, Pitch 0.5 mm", Packing=Tray, PartNumber=STM32F091CCT6, RoHS=TRUE, SRAM="32 Kbytes"

## Via types
v1: diameter 0.6, hole 0.3, Top Layer to Bottom Layer, tented top, 113 vias
v2: diameter 0.8, hole 0.45, Top Layer to Bottom Layer, 65 vias

## Nets (pads, with @x,y where several pads share a name; then routed paths per layer and width w, separated by ;. In a path a pad name is that pad's centre, name@x,y a point inside that pad or via, vN(x,y) a via of type N, cw(c..) or ccw(c..) an arc to the next point about the centre after c; other vN are vias at no path point)
3V3: C2.1 C3.2 C4.1 C5.1 C6.1 C7.1 C8.1 C9.1 C11.1 J1.1 J6.3 L1.2 P1.3 R1.2 R5.1 R7.1 U1.1 U1.9 U1.24 U1.36 U1.48 | length 3.4
  Top Layer w0.254: C5.1@150.507,76.785 C5.1@150.519,76.797 ; P1.3 v1(156.083,95.504) ; R7.1 R7.1@158.263,60.293 ; C7.1@161.001,73.994 C7.1
  other v1: 159.512,58.699 159.461,60.173 159.461,61.595 159.436,63.119 159.41,64.897 159.41,66.523 145.009,67.031 146.05,67.056 146.939,67.056 149.225,73.635 158.598,74.803 159.715,74.828 160.96,74.854 162.154,74.854 163.347,74.854 149.225,75.108 149.276,76.708 149.225,78.359 162.458,78.715 164.059,78.715 168.605,78.715 170.078,78.715 165.532,78.74 166.98,78.74 172.263,78.791 149.225,79.781 132.537,79.959 127.914,79.985 128.956,79.985 129.997,79.985 131.216,79.985 118.847,80.01 119.913,80.01
5V: C13.1 C15.1 J4.3 L2.2 R4.2
12V: C10.1 C14.1 IC1.3 IC1.5 IC2.3 IC2.5 J2.2 J3.1
  other v1: 133.604,69.088 132.385,69.113 132.41,70.155 133.553,70.155 132.004,89.154 133.071,89.154 132.004,89.992 133.02,89.992
  other v2: 144.399,97.663 155.956,97.663 118.364,97.79 120.396,97.79 122.428,97.79 124.587,97.79 126.619,97.79 133.604,97.79 165.481,97.79 167.894,97.79 170.307,97.79 173.355,97.917 118.364,99.695 120.396,99.695 122.428,99.822 124.587,99.822 126.619,99.822 144.399,99.949 155.829,99.949 165.481,99.949 133.604,100.076 167.894,100.076 170.307,100.076 117.602,101.854 122.555,102.108 124.587,102.108 126.619,102.108 133.604,102.108 144.399,102.108 155.829,102.108 165.481,102.108 167.894,102.108 170.307,102.108
BOOT: J1.2 R3.1 U1.44 | length 15.8
  Top Layer w0.254: v1(161.036,82.804) J1.2
  Bottom Layer w0.254: v1(154.305,76.276) 156.261,76.276 158.191,78.207 158.646,78.207 161.036,80.597 v1(161.036,82.804)
"Data Res": J4.2 U1.17 | length 24.6
  Top Layer w0.254: v1(152.6,64.081) 152.666,64.147 152.895,64.147 153.542,64.795 U1.17@153.542,66.031 ; v1(172.085,64.008) 172.593,63.5 J4.2
  Bottom Layer w0.254: v1@152.574,64.081 152.61,64.044 172.049,64.044 v1(172.085,64.008)
Debug: LED2.1 U1.18 | length 6.2
  Top Layer w0.254: LED2.1@152.679,60.374 152.679,63.246 154.04,64.607 U1.18
ESC-Signal: J5.3 U1.11 | length 51.5
  Top Layer w0.254: v1(147.447,64.059) 147.422,64.084 147.422,66.269 149.034,67.881 150.192,67.881 U1.11@150.201,67.89 ; v1(162.763,91.923) 162.829,91.856 174.082,91.856 J5.3@174.244,91.694
  Bottom Layer w0.254: v1(147.447,64.059) 147.447,66.472 162.763,81.788 v1(162.763,91.923)
GND: C2.2 C3.1 C4.2 C5.2 C6.2 C7.2 C8.2 C9.2 C10.2 C11.2 C13.2 C14.2 C15.2 C16.2 IC1.1 IC2.1 J1.3 J2.1 J3.2 J4.1 J5.2 J6.1 LED1.2 MH1.1 MH2.1 MH3.1 MH4.1 P1.5 P1.7 P1.11 R2.2 R3.2 R19.2 SW1.A1 SW1.A2 SW1.G1 U1.8 U1.23 U1.35 U1.47 | length 9.2
  Top Layer w0.254: C3.1@147.422,69.711 C3.1 ; v1(150.978,94.132) 150.99,94.12 150.99,92.318 P1.11 ; C5.2 C5.2@152.051,76.791 ; C6.2@152.007,78.982 C6.2 ; v1(153.492,94.259) 153.518,94.234 153.518,92.203 P1.7@153.543,92.178 ; P1.5@154.813,92.127 v1(154.813,94.183) ; J1.3@163.32,84.804 J1.3 J1.3@163.32,84.804
  Top Layer w0.6: v1(151.181,57.734) 152.671,57.734 LED1.2
  other v1: 122.428,59.792 123.723,59.792 125.095,59.792 126.441,59.792 121.285,59.817 169.164,60.579 169.926,60.96 170.815,60.96 172.085,60.96 169.164,61.341 155.55,62.484 155.524,63.424 125.984,66.65 126.797,66.65 142.57,67.158 143.612,67.158 142.57,68.301 143.586,68.301 160.96,71.704 162.179,71.704 163.474,71.704 169.164,73.406 172.339,73.787 119.609,74.016 121.666,74.041 123.901,74.066 125.933,74.066 127.94,74.066 129.616,74.066 131.343,74.066 132.944,74.066 169.164,74.168 121.488,79.934 122.631,79.934 123.927,79.934 125.12,79.959 126.365,79.959 152.095,80.366 153.518,80.366 154.788,80.391 164.846,86.69 166.599,86.69 126.213,86.766 127.051,86.766 168.91,88.773 172.085,89.154 168.91,89.535 121.564,93.116 122.326,93.116 128.676,94.386 129.565,94.386 130.454,94.386
  other v2: 122.428,105.918 124.714,105.918 126.619,105.918 133.477,105.918 144.272,105.918 155.702,105.918 165.481,105.918 168.148,105.918 170.307,105.918 168.148,107.696 170.307,107.823 173.101,107.823 117.983,107.95 120.269,107.95 122.428,107.95 124.587,107.95 126.619,107.95 133.477,107.95 144.272,108.077 155.702,108.077 165.481,108.077 117.856,109.728 120.269,109.728 122.428,109.728 126.619,109.728 133.477,109.728 173.101,109.728 144.272,109.855 155.702,109.855 165.481,109.855 168.148,109.855 170.307,109.855
IC1_SW: C1.2 IC1.2 L1.1
IC2_SW: C12.2 IC2.2 L2.1
NetC1_1: C1.1 IC1.6
NetC12_1: C12.1 IC2.6
NetIC1_4: IC1.4 R1.1 R2.1
NetIC2_4: IC2.4 R4.1 R19.1
NetLED1_1: LED1.1 R5.2 | length 2
  Top Layer w0.254: LED1.1@154.686,57.633 154.788,57.734 156.489,57.734 156.515,57.76 R5.2
NetLED2_2: LED2.2 R7.2 | length 1.9
  Top Layer w0.254: LED2.2@154.864,60.147 155.092,60.376 R7.2
NRST: C16.1 P1.12 SW1.B1 SW1.B2 U1.7 | length 44.6
  Top Layer w0.254: C16.1@142.977,71.613 147.055,71.613 148.779,69.89 U1.7 ; 146.964,71.628 v1(146.964,72.161) ; v1@151.003,85.979 P1.12
  Bottom Layer w0.254: v1(137.541,59.588) v1(140.106,59.588) v1@140.31,59.792 ; v1@140.106,59.792 v1@140.31,59.792 ; v1@151.079,86.055 151.028,86.055 146.964,81.991 v1(146.964,72.161) 144.164,69.361 144.164,63.646 v1@140.31,59.792
  other v1: 138.786,59.563 151.003,86.03
SWCLK: P1.6 U1.37 | length 15
  Top Layer w0.254: P1.6 154.813,87.21 157.051,84.972 U1.37@157.051,74.24
SWDIO: P1.4 U1.34 | length 23.6
  Top Layer w0.254: P1.4 156.083,87.21 158.217,85.076 158.217,76.352 158.75,75.819 v1(158.826,75.819) ; U1.34@158.401,71.89 159.631,71.89 160.274,71.247 160.807,70.714 v1(160.807,70.637)
  Bottom Layer w0.254: v1@158.76,75.784 157.556,74.58 157.556,73.889 v1(160.807,70.637)
SWO: P1.8 U1.39 | length 15.1
  Top Layer w0.254: P1.8 153.543,87.21 156.051,84.702 U1.39@156.051,74.24
WIPER: J6.2 U1.12 | length 37.8
  Top Layer w0.254: v1(148.311,64.033) 148.311,66.507 149.185,67.381 150.192,67.381 U1.12@150.201,67.39 ; v1(172.212,76.2) 172.275,76.263 174.434,76.263 J6.2
  Bottom Layer w0.254: v1(148.311,64.033) 148.311,66.472 158.496,76.657 163.302,76.657 163.759,76.2 v1(172.212,76.2)
pads on no net: J4.MH1 J4.MH2 J4.MH3 J5.1 J5.MH1 J5.MH2 J5.MH3 J6.MH1 J6.MH2 J6.MH3 P1.1 P1.2 P1.9 P1.10 P1.13 P1.14 U1.2 U1.3 U1.4 U1.5 U1.6 U1.10 U1.13 U1.14 U1.15 U1.16 U1.19 U1.20 U1.21 U1.22 U1.25 U1.26 U1.27 U1.28 U1.29 U1.30 U1.31 U1.32 U1.33 U1.38 U1.40 U1.41 U1.42 U1.43 U1.45 U1.46

## Polygon pours and split planes (outlines as drawn)
GND on Top Layer "Top Layer-GND 2" (solid, pour order 242): 143.332,62.789 144.221,63.678 144.221,68.866 144.437,69.082 148.107,69.082 148.209,69.183 151.155,69.183 151.257,69.285 151.257,69.437 151.13,69.564 148.565,69.564 147.726,70.402 142.519,70.402 134.137,78.784 133.68,79.242 127.381,79.242 127.09,79.533 127.112,82.251 126.726,82.637 120.935,82.637 120.704,82.406 120.704,79.531 120.371,79.197 118.516,79.197 118.288,78.969 118.288,73.895 118.288,71.069 118.574,70.783 125.844,70.783 126.409,71.349 133.629,71.349 134.315,70.663 134.315,63.221 134.747,62.789
NRST on Top Layer "NRST_L01_P244" (solid, pour order 244): 134.722,62.535 143.332,62.535 144.221,61.646 144.221,59.868 143.51,59.157 134.823,59.157 134.264,59.715 134.264,61.951
GND on Top Layer "GND_L01_P197" (solid, pour order 197): 168.91,61.849 169.545,61.849 173.736,61.849 175.26,61.849 175.387,61.722 175.387,60.198 175.26,60.071 173.736,60.071 169.545,60.071 168.783,60.071 168.656,60.198 168.656,61.722
BOOT on Top Layer "Top Layer-BOOT" (solid, pour order 211): 153.797,75.717 155.118,75.717 155.321,75.921 155.321,78.003 155.092,78.232 153.06,78.232 152.908,78.08 152.908,76.073 153.341,75.64 153.342,75.449 153.342,73.226 153.467,73.101 153.67,73.101 153.772,73.203 153.772,75.692
GND on Top Layer "Top Layer-GND" (solid, pour order 196): 127.305,86.436 127.461,86.589 127.449,88.12 127.254,88.316 126.009,88.316 125.806,88.113 125.806,86.563 125.933,86.436
12V on Top Layer "Top Layer-12V" (solid, pour order 203): 134.361,88.768 134.188,88.595 134.163,88.57 128.6,88.57 127.737,89.433 127.279,89.433 125.984,89.433 125.034,88.484 123.59,88.479 123.59,88.484 123.434,88.64 123.437,88.642 123.437,89.094 123.438,89.094 123.587,89.243 123.589,89.242 124.777,89.242 126.898,91.364 133.767,91.364 134.361,90.754
GND on Top Layer "Top Layer-GND 7" (solid, pour order 219): 133.782,91.567 134.366,92.151 134.366,94.158 133.731,94.793 119.177,94.793 118.643,94.259 118.643,91.364 119.075,90.932 125.984,90.932 126.619,91.567
12V on Top Layer "Top Layer-12V" (solid, pour order 221): 134.158,68.6 133.985,68.428 133.96,68.402 128.397,68.402 127.533,69.266 127.076,69.266 125.781,69.266 124.831,68.316 123.387,68.312 123.387,68.316 123.231,68.472 123.234,68.475 123.234,68.927 123.235,68.927 123.384,69.076 123.386,69.074 124.573,69.074 126.695,71.196 133.563,71.196 134.158,70.587
GND on Top Layer "Top Layer-GND" (solid, pour order 227): 126.721,62.535 127.107,62.149 127.086,59.547 126.797,59.258 120.955,59.258 120.699,59.514 120.699,62.304 120.929,62.535
NetIC1_4 on Top Layer "Top Layer-NetIC1_4" (solid, pour order 217): 120.523,85.471 120.396,85.344 118.796,85.344 118.643,85.496 118.643,90.297 119.05,90.703 124.587,90.703 124.866,90.424 124.866,89.56 124.739,89.433 123.419,89.433 122.428,88.443 120.853,88.443 120.523,88.113
3V3 on Top Layer "Top Layer-3V3 1" (solid, pour order 235): 118.313,79.604 118.567,79.35 120.244,79.35 120.523,79.629 120.523,82.652 120.701,82.829 126.797,82.829 127.305,82.321 127.305,79.629 127.584,79.35 133.858,79.35 140.538,72.669 151.181,72.669 151.74,73.228 151.74,75.616 151.155,76.2 151.155,80.543 150.927,80.772 149.606,80.772 145.669,84.709 134.036,84.709 134.034,84.711 126.86,84.709 118.593,84.709 118.313,84.43
NetC1_1 on Top Layer "NETC1_1_L01_P194" (solid, pour order 194): 124.866,86.893 124.689,86.716 120.879,86.716 120.675,86.919 120.675,88.062 120.904,88.29 122.453,88.29 123.596,88.29 124.739,88.29 124.866,88.163
IC1_SW on Top Layer "Top Layer-IC1_SW" (solid, pour order 216): 134.366,85.268 134.036,84.938 120.853,84.938 120.675,85.115 120.675,86.081 120.879,86.284 127.455,86.284 127.455,86.285 127.606,86.436 127.61,86.436 127.61,88.138 127.621,88.144 127.296,88.477 126.007,88.477 125.9,88.584 125.9,89.146 125.902,89.146 125.997,89.241 127.7,89.241 128.524,88.417 131.978,88.417 134.163,88.417 134.366,88.214
5V on Top Layer "Top Layer-5V" (solid, pour order 229): 144.094,53.772 159.36,53.772 170.739,65.151 175.26,65.151 175.387,65.278 175.387,66.802 175.26,66.929 169.037,66.929 158.115,56.007 144.399,56.007 137.719,56.007 134.087,59.639 134.087,64.338 134.087,64.366 133.833,64.62 126.86,64.618 118.593,64.618 118.313,64.338 118.313,59.512 118.567,59.258 120.244,59.258 120.523,59.538 120.523,62.56 120.701,62.738 126.797,62.738 127.305,62.23 127.305,59.538 133.071,53.772
NetIC2_4 on Top Layer "Top Layer-NetIC2_4" (solid, pour order 222): 120.294,65.126 120.142,64.973 118.567,64.973 118.567,64.999 118.415,65.151 118.415,70.129 118.821,70.536 124.358,70.536 124.638,70.256 124.638,69.393 124.511,69.266 123.19,69.266 122.199,68.275 120.625,68.275 120.294,67.945
IC2_SW on Top Layer "Top Layer-IC2_SW" (solid, pour order 225): 134.163,64.999 133.934,64.77 120.65,64.77 120.548,64.872 120.548,65.989 120.675,66.116 127.252,66.116 127.252,66.117 127.403,66.269 127.406,66.269 127.406,67.97 127.418,67.976 127.093,68.309 125.804,68.309 125.697,68.416 125.697,68.979 125.699,68.979 125.794,69.074 127.497,69.074 128.321,68.25 131.775,68.25 133.96,68.25 134.163,68.047
GND on Top Layer "Top Layer-GND" (solid, pour order 224): 127.1,66.269 127.256,66.421 127.244,67.953 127.049,68.148 125.804,68.148 125.601,67.945 125.601,66.396 125.728,66.269
NetC12_1 on Top Layer "NETC12_1_L01_P223" (solid, pour order 223): 124.936,66.751 124.759,66.573 120.949,66.573 120.745,66.777 120.745,67.92 120.974,68.148 122.523,68.148 123.666,68.148 124.809,68.148 124.936,68.021
GND on Top Layer "GND_L01_P200" (solid, pour order 200): 116.776,110.109 117.284,110.617 174.561,110.617 174.942,110.236 174.942,104.902 174.561,104.521 174.489,104.593 117.308,104.593 117.308,104.624 116.776,105.156
12V on Top Layer "12V_L01_P201" (solid, pour order 201): 116.459,102.362 116.967,102.87 174.244,102.87 174.625,102.489 174.625,97.155 174.244,96.774 174.172,96.846 116.991,96.846 116.991,96.877 116.459,97.409
GND on Top Layer "Top Layer-GND 3" (solid, pour order 205): 152.679,78.181 152.908,78.41 155.042,78.41 155.296,78.664 155.296,80.543 155.067,80.772 151.562,80.772 151.333,80.543 151.333,76.302 151.816,75.819 151.818,75.449 151.818,73.226 151.943,73.101 152.146,73.101 152.248,73.203 152.248,75.692 152.679,76.124
3V3 on Top Layer "3V3_L01_P207" (solid, pour order 207): 151.13,69.088 151.257,68.961 151.257,68.834 151.13,68.707 149.225,68.707 146.99,66.472 144.805,66.472 144.501,66.777 144.501,68.707 144.602,68.809 148.006,68.809 148.285,69.088
3V3 on Top Layer "Top Layer-3V3" (solid, pour order 209): 157.455,57.302 157.683,57.074 158.674,57.074 160.071,58.471 160.071,67.005 159.969,67.107 156.997,67.107 156.87,66.98 156.87,64.938 157.455,63.881 157.455,58.471
GND on Top Layer "Top Layer-GND 1" (solid, pour order 210): 155.118,61.925 155.245,61.798 157.15,61.798 157.302,61.951 157.302,63.826 156.743,64.858 156.743,67.056 156.667,67.132 156.413,67.132 156.337,67.056 156.337,64.948 156.159,64.77 155.448,64.77 155.118,64.44 155.118,63.729
GND on Top Layer "Top Layer-GND 5" (solid, pour order 213): 169.545,72.898 173.736,72.898 175.26,72.898 175.387,73.025 175.387,74.549 175.26,74.676 173.736,74.676 169.57,74.676 168.885,74.676 168.859,74.651 167.386,73.177 160.376,73.177 159.741,72.542 157.429,72.542 157.328,72.441 157.328,72.288 157.455,72.187 159.741,72.187 160.63,71.298 163.855,71.298 167.945,71.298
3V3 on Top Layer "Top Layer-3V3 3" (solid, pour order 214): 171.831,77.978 173.609,77.978 175.26,77.978 175.387,78.105 175.387,79.654 175.26,79.781 169.596,79.781 167.97,81.407 162.103,81.407 161.569,80.874 161.569,76.098 161.163,76.098 160.376,75.311 157.632,75.311 157.353,75.032 157.353,72.822 157.48,72.695 159.695,72.695 160.426,73.355 163.728,73.33 167.183,73.33
GND on Top Layer "Top Layer-GND 4" (solid, pour order 215): 162.052,84.353 162.23,84.176 165.887,84.176 166.04,84.328 166.065,84.328 166.065,85.039 169.113,88.087 175.006,88.087 175.362,88.443 175.362,89.967 175.082,90.246 167.107,90.246 162.052,85.192
12V on Bottom Layer "Bottom Layer-12V" (solid, pour order 246): 129.95,96.846 131.242,95.555 131.242,89.383 132.055,88.57 134.518,88.57 134.874,88.214 134.874,73.66 131.572,70.358 131.572,68.58 131.75,68.402 140.741,68.402 142.088,69.748 142.088,95.377 143.557,96.846 174.172,96.846 174.244,96.774 174.625,97.155 174.625,102.489 174.244,102.87 116.967,102.87 116.459,102.362 116.459,97.409 116.991,96.877 116.991,96.846
GND on Bottom Layer "GND_L04_P202" (solid, pour order 202): 116.713,110.109 117.221,110.617 174.498,110.617 174.879,110.236 174.879,104.902 174.498,104.521 174.426,104.593 117.245,104.593 117.245,104.624 116.713,105.156
GND on GND "GND_L02_P199" (solid, pour order 199): 115.951,116.332 176.022,116.332 176.022,52.832 115.951,52.832
3V3 on 3V3 "3V3_L03_P198" (solid, pour order 198): 115.824,94.742 115.824,58.039 176.149,58.039 176.276,58.166 176.276,82.677 163.068,82.677 162.941,82.804 163.068,82.931 163.068,96.774 141.605,96.774 139.573,94.742

## Other copper
Top Layer:
  pour cut-out: 127.635,86.284 129.436,86.284 127.635,86.284

## Silkscreen, mask and mechanical layers (free items; w line width, h text height)
Top Overlay:
  text "Motorsteuerung" at 123.698,114.173 h1.52
Mechanical 1:
  the board outline again, w0.254